# EAGLE board mouse (EAGLE 8.0.0)
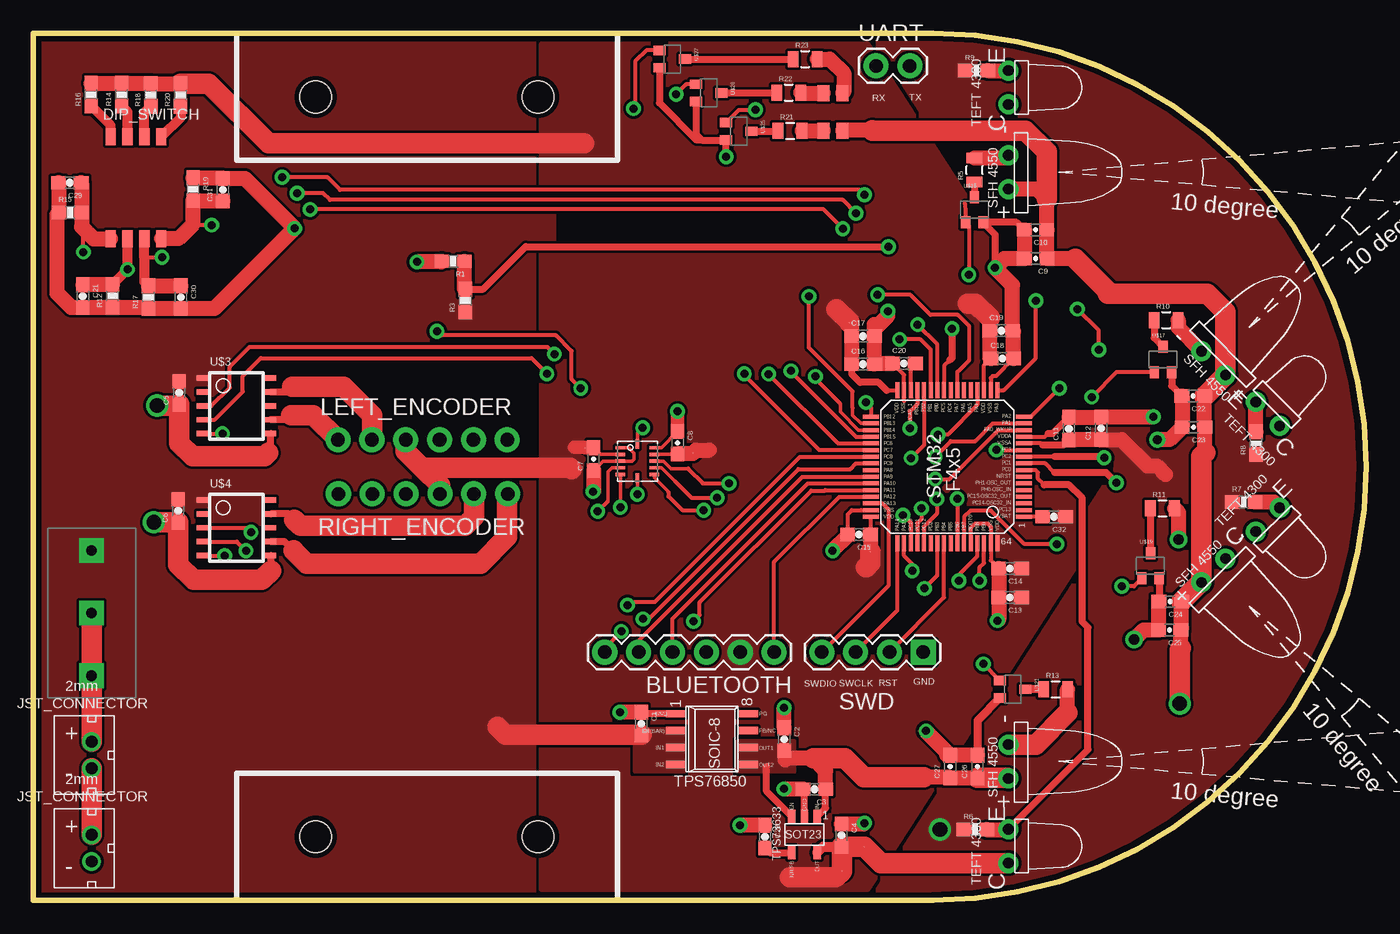
[diagram p0: board, top side]
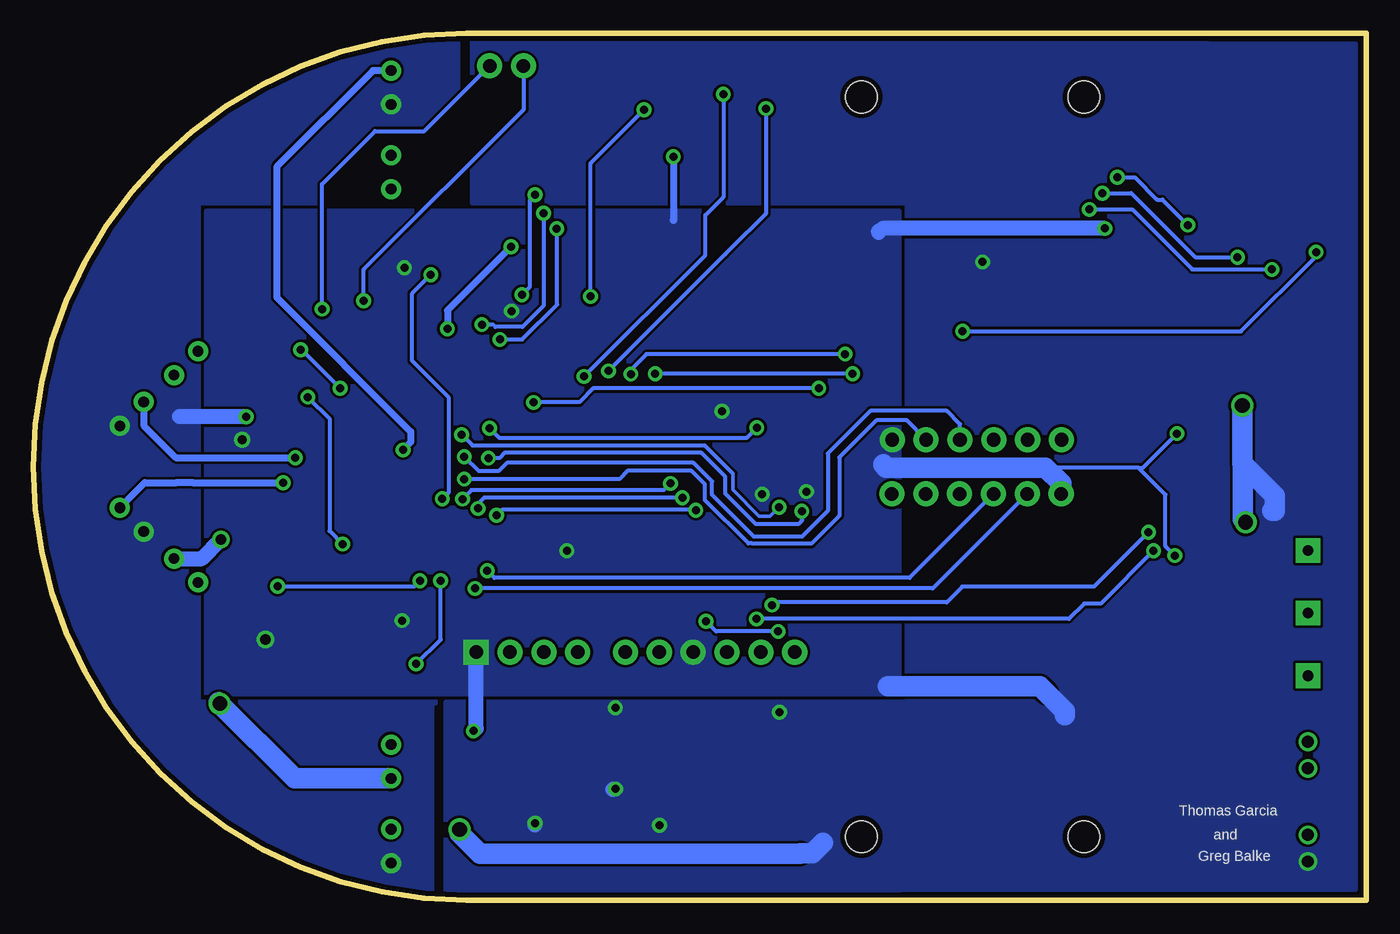
[diagram p1: board, bottom side, seen from below]

Size 100 x 65.02 mm. Coordinates in mm from the lower left corner, seen from the top.
Outline: 0,0 0,65.02 67.49,65.02 arc-180 67.49,0 0,0
Copper layers (1*16): Top 0.0356mm / dielectric 1.5011mm / Bottom 0.0356mm
Design rules "micromouse2016-17DRC": minimum track width 10mil, minimum drill 16mil, track to track 8mil, track to pad 8mil, pad to pad 8mil, via to via 8mil, smd to smd 8mil, copper to edge 15mil, drill to drill 8mil, minimum pad ring 10mil, minimum via ring 10mil, stop-mask expansion 4mil, vias tented up to drill 0mil, thermal gap 10mil
Holes 2.38 mm at 37.87,60.25 21.18,60.25 21.18,4.78 37.87,4.78

## Footprints (pad centres in the part's own frame; a part is rotated, then mirrored left to right if it is on the bottom)
JST_CONNECTOR_FEMALE = drill 0.889: + 0,1; - 0,-1
1X06 = drill 1.016 pad 1.88: 1 0,0; 2 2.54,0; 3 5.08,0; 4 7.62,0; 5 10.16,0; 6 12.7,0
0603-CAP = smd 1.1 x 1: 1 -0.85,0; 2 0.85,0
218_4LPSTR = smd 0.76 x 1.27: IN1 -1.95,3.81; IN2 -0.68,3.81; IN3 0.59,3.81; IN4 1.86,3.81; OUT1 -1.95,-3.81; OUT2 -0.68,-3.81; OUT3 0.59,-3.81; OUT4 1.86,-3.81
1X06_NO_SILK = drill 1.016 pad 1.88: 1 0,0; 2 2.54,0; 3 5.08,0; 4 7.62,0; 5 10.16,0; 6 12.7,0
0603-RES = smd 1.1 x 1: 1 -0.85,0; 2 0.85,0
0805 = smd 0.8 x 1.2: 1 -0.9,0; 2 0.9,0
1X04 = drill 1.016 pad 1.88 square: 1 0,0 | drill 1.016 pad 1.88: 2 2.54,0; 3 5.08,0; 4 7.62,0
SPLITTER = smd 0.102 x 0.102: 1 0,0; 2 0,0
LB1930MC = smd 0.833 x 0.406: 1 -2.58,2.08; 2 -2.58,1.04; 3 -2.58,0; 4 -2.58,-1.04; 5 -2.58,-2.08; 6 2.58,2.08; 7 2.58,1.04; 8 2.58,0; 9 2.58,-1.04; 10 2.58,-2.08
4-PLCC = smd 1.2 x 0.9: BLUE -1.4,0.725; GREEN 1.4,0.725; RED 1.4,-0.725; VCC -1.4,-0.725
BMG160 = smd 0.7 x 0.25: P$1 -1.275,1; P$2 -1.275,0.5; P$3 -1.275,0; P$4 -1.275,-0.5; P$5 -1.275,-1; P$7 1.275,-1; P$8 1.275,-0.5; P$9 1.275,0; P$10 1.275,0.5; P$11 1.275,1 | smd 0.25 x 0.7: P$6 0,-1.275; P$12 0,1.275
EMITTER = drill 0.8 pad 1.5: + 1.27,-0.5; - -1.27,-0.5
RECEIVER = drill 0.8 pad 1.5: C 1.27,-0.5; E -1.27,-0.5
DMG1012UW = smd 0.7 x 0.9: DRAIN 0,1; GATE -0.65,-0.9; SOURCE 0.65,-0.9
TPS76850(SOIC-8) = smd 0.55 x 1.5: EN(BAR) -0.635,-2.7; FB/NC -0.635,2.7; GND -1.905,-2.7; IN1 0.635,-2.7; IN2 1.905,-2.7; OUT1 0.635,2.7; OUT2 1.905,2.7; PG -1.905,2.7
TPS73633(SOT-23) = smd 0.55 x 1: EN 0.95,-1.35; GND 0,-1.35; IN -0.95,-1.35; NR/FB 0.95,1.35; OUT -0.95,1.35
STM32F411RE_LQFP64 = smd 1.2 x 0.3: BOOT0 -5.75,-1.75; PA3 5.75,-3.75; PA4 5.75,-2.25; PA5 5.75,-1.75; PA6 5.75,-1.25; PA7 5.75,-0.75; PA14 -5.75,3.75; PA15 -5.75,3.25; PB0 5.75,0.75; PB1 5.75,1.25; PB2 5.75,1.75; PB3 -5.75,0.75; PB4 -5.75,0.25; PB5 -5.75,-0.25; PB6 -5.75,-0.75; PB7 -5.75,-1.25; PB8 -5.75,-2.25; PB9 -5.75,-2.75; PB10 5.75,2.25; PC4 5.75,-0.25; PC5 5.75,0.25; PC10 -5.75,2.75; PC11 -5.75,2.25; PC12 -5.75,1.75; PD2 -5.75,1.25; VCAP_1 5.75,2.75; VDD_0 5.75,-2.75; VDD_1 5.75,3.75; VDD_3 -5.75,-3.75; VSS_0 5.75,-3.25; VSS_1 5.75,3.25; VSS_3 -5.75,-3.25 | smd 0.3 x 1.2: NRST -0.75,-5.75; PA0_WKUP 2.75,-5.75; PA1 3.25,-5.75; PA2 3.75,-5.75; PA8 -0.25,5.75; PA9 -0.75,5.75; PA10 -1.25,5.75; PA11 -1.75,5.75; PA12 -2.25,5.75; PA13 -2.75,5.75; PB12 3.75,5.75; PB13 3.25,5.75; PB14 2.75,5.75; PB15 2.25,5.75; PC0 -0.25,-5.75; PC1 0.25,-5.75; PC2 0.75,-5.75; PC3 1.25,-5.75; PC6 1.75,5.75; PC7 1.25,5.75; PC8 0.75,5.75; PC9 0.25,5.75; PC13 -3.25,-5.75; PC14 -2.75,-5.75; PC15 -2.25,-5.75; PH0 -1.75,-5.75; PH1 -1.25,-5.75; VBAT -3.75,-5.75; VDD_2 -3.75,5.75; VDDA 2.25,-5.75; VSS_2 -3.25,5.75; VSSA 1.75,-5.75
500SSP1S2M2QEA = drill 0.8 pad 1.854 square: 1 0,4.699; 2 0,0; 3 0,-4.699
1X02 = drill 1.016 pad 1.88: 1 0,0; 2 2.54,0

## Placement (x,y rotation side)
BAT1  JST_CONNECTOR_FEMALE  [JST_CONNECTOR_FEMALE]  4.37,3.91 0 top
BAT2  JST_CONNECTOR_FEMALE  [JST_CONNECTOR_FEMALE]  4.37,10.9 0 top
BLUETOOTH  [1X06]  55.58,18.62 180 top
C1  100nF  [0603-CAP]  45.62,13.26 270 top
C2  10uF  [0603-CAP]  56.34,12.09 270 top
C3  100nF  [0603-CAP]  58.6,8.33 180 top
C4  10uF  [0603-CAP]  60.63,4.88 270 top
C5  1uF  [0603-CAP]  10.95,38.05 90 top
C6  1uF  [0603-CAP]  10.87,29.21 90 top
C7  100nF  [0603-CAP]  42.04,33.1 90 top
C8  100nF  [0603-CAP]  48.34,34.32 270 top
C9  100nF  [0603-CAP]  75.21,48.13 180 top
C10  4.7uF  [0603-CAP]  75.18,50.29 180 top
C11  100nF  [0603-CAP]  77.7,35.38 90 top
C12  1uF  [0603-CAP]  80.11,35.41 90 top
C13  100nF  [0603-CAP]  73.28,22.71 180 top
C14  100nF  [0603-CAP]  73.28,24.89 180 top
C15  100nF  [0603-CAP]  61.95,27.43 180 top
C16  100nF  [0603-CAP]  62.26,40.21 0 top
C17  100nF  [0603-CAP]  62.26,42.32 0 top
C18  100nF  [0603-CAP]  72.69,40.64 0 top
C19  4.7uF  [0603-CAP]  72.62,42.72 0 top
C20  4.7uF  [0603-CAP]  65.33,40.26 0 top
C21  100nF  [0603-CAP]  3.71,45.31 270 top
C22  100nF  [0603-CAP]  87.02,37.82 180 top
C23  4.7uF  [0603-CAP]  87.05,35.48 180 top
C24  100nF  [0603-CAP]  85.29,22.4 180 top
C25  4.7uF  [0603-CAP]  85.27,20.27 180 top
C26  100nF  [0603-CAP]  70.84,10.03 90 top
C27  4.7uF  [0603-CAP]  68.78,10.03 90 top
C28  10nF  [0603-CAP]  54.89,4.78 270 top
C29  100nF  [0603-CAP]  2.74,53.82 180 top
C30  100nF  [0603-CAP]  11.07,45.24 270 top
C31  100nF  [0603-CAP]  14.22,53.29 90 top
C32  100nF  [0603-CAP]  76.58,28.77 180 top
DIP_SWITCH  218_4LPSTR  [218_4LPSTR]  7.75,53.44 0 top
LEFT_ENCODER  [1X06_NO_SILK]  22.86,34.54 0 top
R1  33k  [0603-RES]  31.5,47.93 180 top
R3  51k  [0603-RES]  32.41,44.98 90 top
R5  36  [0805]  70.61,54.76 90 top
R6  1.8k  [0603-RES]  70.66,5.31 0 top
R7  1.8k  [0603-RES]  90.81,29.87 0 top
R8  1.8k  [0603-RES]  91.74,34.29 90 top
R9  1.8k  [0603-RES]  70.76,62.23 0 top
R10  36  [0805]  84.99,43.51 0 top
R11  36  [0805]  84.71,29.39 0 top
R12  10k  [0603-RES]  5.94,45.34 90 top
R13  36  [0805]  76.71,15.82 0 top
R14  360  [0603-RES]  6.63,60.43 90 top
R15  10k  [0603-RES]  2.77,51.59 0 top
R16  360  [0603-RES]  4.34,60.43 90 top
R17  10k  [0603-RES]  8.64,45.24 90 top
R18  360  [0603-RES]  8.81,60.4 90 top
R19  10k  [0603-RES]  11.99,53.34 270 top
R20  360  [0603-RES]  11.05,60.4 90 top
R21  82  [0805]  56.77,57.71 0 top
R22  82  [0805]  56.67,60.58 0 top
R23  150  [0805]  57.91,63.09 0 top
RIGHT_ENCODER  [1X06_NO_SILK]  35.59,30.48 180 top
SWD  [1X04]  66.78,18.62 180 top
U$1  SPLITTER  [SPLITTER]  9.27,32.74 0 bottom
U$2  SPLITTER  [SPLITTER]  23.95,15.52 0 bottom
U$3  LB1930MCSMD  [LB1930MC]  15.24,37.08 0 top
U$4  LB1930MCSMD  [LB1930MC]  15.24,27.94 0 top
U$5  XZMECBDDG45S  [4-PLCC]  59.99,59.13 90 top
U$6  BMG160  [BMG160]  45.31,32.94 0 top
U$7  EMITTER  [EMITTER]  88.9,40.64 315 top
U$8  RECEIVER  [RECEIVER]  73.66,4.06 270 top
U$9  SPLITTER  [SPLITTER]  42.44,3.53 0 bottom
U$10  RECEIVER  [RECEIVER]  92.96,28.19 225 top
U$11  RECEIVER  [RECEIVER]  92.96,36.83 315 top
U$12  RECEIVER  [RECEIVER]  73.66,60.96 270 top
U$13  SPLITTER  [SPLITTER]  60.66,2.18 0 top
U$14  SPLITTER  [SPLITTER]  62.36,4.01 180 top
U$15  DMG1012UW  [DMG1012UW]  70.61,51.74 0 top
U$16  EMITTER  [EMITTER]  88.9,24.38 225 top
U$17  DMG1012UW  [DMG1012UW]  84.76,40.51 0 top
U$18  EMITTER  [EMITTER]  73.66,10.41 270 top
U$19  DMG1012UW  [DMG1012UW]  83.82,25.04 0 top
U$21  DMG1012UW  [DMG1012UW]  73.43,15.82 270 top
U$22  TPS76850(SOIC-8)  [TPS76850(SOIC-8)]  50.9,12.09 270 top
U$23  TPS73633(SOT-23)  [TPS73633(SOT-23)]  57.86,4.93 180 top
U$24  STM32F411RE_LQFP64  [STM32F411RE_LQFP64]  68.58,32.51 90 top
U$25  DMG1012UW  [DMG1012UW]  52.88,57.68 270 top
U$26  DMG1012UW  [DMG1012UW]  50.62,60.55 270 top
U$27  DMG1012UW  [DMG1012UW]  47.88,63.09 270 top
U$28  500SSP1S2M2QEA  [500SSP1S2M2QEA]  4.37,21.54 0 top
U$29  SPLITTER  [SPLITTER]  61.24,43.33 0 top
U$30  SPLITTER  [SPLITTER]  71.75,43.69 0 top
U$31  SPLITTER  [SPLITTER]  41.38,33.93 0 top
U$32  SPLITTER  [SPLITTER]  49.48,33.53 0 top
U$33  SPLITTER  [SPLITTER]  62.81,26.14 0 top
U$34  EMITTER  [EMITTER]  73.66,54.61 270 top
UART  [1X02]  63.22,62.59 0 top

## Library data of the parts
BAT1 BAT2 = JST_CONNECTOR_FEMALE. through hole
BLUETOOTH LEFT_ENCODER RIGHT_ENCODER = SparkFun-Connectors; PROD_ID: CONN-08437
C1-C4 C20 C21 C28-C31 R5 R10-R23 = SparkFun
C5 C6 C11-C19 C32 R1 R3 = SparkFun-Passives
C7-C10 C22-C27 = SparkFun-Capacitors
DIP_SWITCH U$3-U$6 U$15 U$17 U$19 U$21 U$24-U$28 = custom_parts
R6-R9 = SparkFun-Resistors
SWD = SparkFun-Connectors; PROD_ID: CONN-09696
U$1 U$2 U$9 U$13 U$14 U$29-U$33 = natcar
U$7 U$16 U$18 U$34 = sfh4550 _ teft4300
U$8 U$10-U$12 = sfh4550 & teft4300
U$22 = TPS76850(SOIC-8)
U$23 = TPS73633(SOT-23)
UART = SparkFun-Connectors

## Nets
5V: C2.2 C3.1 C9.1 C10.1 C22.1 C23.1 C24.1 C25.1 C26.1 C27.1 U$5.VCC U$7.+ U$16.+ U$18.+ U$22.OUT1 U$22.OUT2 U$23.EN U$23.IN U$34.+
AGND: C11.1 C12.1 R6.1 R7.1 R8.1 R9.1 U$9.1 U$24.VSSA
BAT: C1.2 C5.2 C6.2 R3.1 U$3.1 U$4.1 U$22.EN(BAR) U$22.IN1 U$22.IN2 U$28.1
BAT_DIVIDER: R1.1 R3.2 U$24.PC5
BLUE_GATE: U$24.PB13 U$25.GATE
BRX: BLUETOOTH.4 U$24.PA10
BTX: BLUETOOTH.5 U$24.PA9
BUTTON1: C29.1 DIP_SWITCH.OUT1 R15.2 U$24.PB12
BUTTON2: C21.1 DIP_SWITCH.OUT2 R12.2 U$24.PB1
BUTTON3: C30.1 DIP_SWITCH.OUT3 R17.2 U$24.PB0
BUTTON4: C31.1 DIP_SWITCH.OUT4 R19.2 U$24.PA7
CTS: BLUETOOTH.6 U$24.PA11
DGND: BLUETOOTH.3 C7.1 C8.1 C9.2 C10.2 C13.2 C14.2 C15.2 C16.2 C17.2 C18.2 C19.2 C20.1 C21.2 C22.2 C23.2 C24.2 C25.2 C26.2 C27.2 C29.2 C30.2 C31.2 LEFT_ENCODER.6 R12.1 R15.1 R17.1 R19.1 RIGHT_ENCODER.6 SWD.1 U$2.1 U$3.5 U$4.5 U$6.P$1 U$6.P$3 U$6.P$6 U$6.P$11 U$15.SOURCE U$17.SOURCE U$19.SOURCE U$21.SOURCE U$24.BOOT0 U$24.VSS_0 U$24.VSS_1 U$24.VSS_2 U$24.VSS_3 U$25.SOURCE U$26.SOURCE U$27.SOURCE
FRONT_LEFT_EMITTER: U$17.GATE U$24.PB7
FRONT_LEFT_RECEIVER: R8.2 U$11.E U$24.PC2
FRONT_RIGHT_EMITTER: U$19.GATE U$24.PB9
FRONT_RIGHT_RECEIVER: R7.2 U$10.E U$24.PC1
GND: BAT1.- C1.1 C2.1 C3.2 C4.1 C28.1 R1.2 U$1.2 U$2.2 U$9.2 U$22.GND U$23.GND
GREEN_GATE: U$24.PB14 U$26.GATE
GYRO_INT1: U$6.P$4 U$24.PB2
GYRO_INT2: U$6.P$12 U$24.PB10
LEFT_A: LEFT_ENCODER.4 U$24.PA1
LEFT_B: LEFT_ENCODER.5 U$24.PA0_WKUP
LEFT_BWD: U$3.3 U$24.PC6
LEFT_EMITTER: U$15.GATE U$24.PB6
LEFT_FWD: U$3.4 U$24.PC7
LEFT_RECEIVER: R9.2 U$12.E U$24.PC3
MGND: C5.1 C6.1 U$1.1 U$3.10 U$4.10
MISO: U$6.P$8 U$24.PC11
MOSI: U$6.P$9 U$24.PC12
N$1: BAT1.+ BAT2.-
N$2: RIGHT_ENCODER.2 U$4.7
N$3: RIGHT_ENCODER.1 U$4.9
N$4: LEFT_ENCODER.2 U$3.7
N$5: LEFT_ENCODER.1 U$3.9
N$6: R5.2 U$34.-
N$7: BAT2.+ U$28.2 U$28.3
N$8: C20.2 U$24.VCAP_1
N$9: R5.1 U$15.DRAIN
N$10: R10.2 U$7.-
N$11: R10.1 U$17.DRAIN
N$12: R11.2 U$16.-
N$13: R21.2 U$5.BLUE
N$14: R11.1 U$19.DRAIN
N$15: R13.2 U$18.-
N$16: R13.1 U$21.DRAIN
N$17: C28.2 U$23.NR/FB
N$18: C4.2 U$13.2 U$14.2 U$23.OUT
N$19: C32.2 U$24.VBAT
N$20: DIP_SWITCH.IN2 R14.1
N$21: DIP_SWITCH.IN1 R16.1
N$22: R22.2 U$5.GREEN
N$23: DIP_SWITCH.IN3 R18.1
N$24: R23.2 U$5.RED
N$25: DIP_SWITCH.IN4 R20.1
N$26: R22.1 U$26.DRAIN
N$27: R21.1 U$25.DRAIN
N$28: R23.1 U$27.DRAIN
N$30: C8.2 U$6.P$10 U$32.2
N$32: C7.2 U$6.P$2 U$31.2
RED_GATE: U$24.PB15 U$27.GATE
RIGHT_A: RIGHT_ENCODER.4 U$24.PA15
RIGHT_B: RIGHT_ENCODER.5 U$24.PB3
RIGHT_BWD: U$4.3 U$24.PC8
RIGHT_EMITTER: U$21.GATE U$24.PB8
RIGHT_FWD: U$4.4 U$24.PC9
RIGHT_RECEIVER: R6.2 U$8.E U$24.PC0
RST: SWD.2 U$24.PB4
RTS: BLUETOOTH.1 U$24.PA12
RX: U$24.PA3 UART.1
SCK: U$6.P$7 U$24.PC10
SS: U$6.P$5 U$24.PA4
SWCLK: SWD.3 U$24.PA14
SWDIO: SWD.4 U$24.PA13
TX: U$24.PA2 UART.2
VDD: BLUETOOTH.2 C13.1 C14.1 C32.1 LEFT_ENCODER.3 R14.2 R16.2 R18.2 R20.2 RIGHT_ENCODER.3 U$13.1 U$24.VDD_3 U$29.2 U$30.2 U$31.1 U$32.1 U$33.1
VDD15: C15.1 U$24.VDD_2 U$33.2
VDD_0: C18.1 C19.1 U$24.VDD_0 U$30.1
VDD_1: C16.1 C17.1 U$24.VDD_1 U$29.1
VDDA: C11.2 C12.2 U$8.C U$10.C U$11.C U$12.C U$14.1 U$24.VDDA

## Tracks (layer width: path | path; a pad name or v marks a point on that pad's centre or on a via)
5V  (via drill 1.1)
  Top 0.508: U$23.EN 55.02,8.17 55.02,10.03 | U$23.IN 59.45,6.91 C3.1
  Top 1.143: C26.1 C27.1 68.75,9.22 66.8,9.22 | 86.11,18.9 86.11,20.74 C25.1 86.12,22.38 C24.1 86.21,22.4 | C22.1 87.87,35.48 C23.1 87.9,33.29 87.65,33.29 | 78.18,48.13 C9.1 76.06,50.27 C10.1 76.03,52.62 75.31,53.34 U$34.+ | 62.94,57.76 60.75,57.76 U$5.VCC | C3.1 59.45,9.72 58.52,10.64 56.54,10.64 56.41,10.52
  Top 1.524: v86,14.76 86,18.8 86.11,18.9 | 87.94,33.58 87.65,33.29 U$16.+ | 89.44,44.13 88.09,45.49 80.62,45.49 80.62,45.7 78.18,48.13 | 89.44,44.13 | 89.44,44.13 U$7.+ C22.1 | U$16.+ | C24.1 87.58,23.84 U$16.+ | U$18.+ 73.12,9.18 C26.1 | 76.03,52.62 76.03,56.15 74.45,57.73 62.97,57.73 62.94,57.76 | 58.52,10.64 60.91,10.64 62.33,9.22 66.8,9.22
  Bottom 1.524: 86.11,14.86 v86,14.76 80.39,9.14 U$18.+
  pour Top (no thermals): 52.83,11.96 57.07,11.96 57.07,9.63 52.83,9.63
AGND  (via drill 1.11)
  Top 0.305: 75.74,34.14 75.62,34.26 U$24.VSSA
  Top 0.508: C11.1 77.3,34.14 75.74,34.14
  Top 1.143: C11.1 80.09,34.53 C12.1 81.65,34.56 83.62,32.59 84.28,32.59 84.94,31.93
  Bottom 1.524: U$9.1 42.47,3.5 66.5,3.5 68.02,5.03 v68.02,5.31
  pour Top (rank 3, no thermals): 60.96,64.31 67.31,64.31 arc-180 67.31,0.79 60.96,0.79 81.28,32.51
BAT
  Top 1.524: C1.2 35.42,12.41 34.82,13.01
  pour Top (rank 3, no thermals): 0.64,64.31 0.64,0.76 39.12,0.76 39.12,64.31
  pour Top (no thermals): 45.16,12.88 48.79,12.88 48.79,9.63 45.16,9.63
BAT_DIVIDER  (via drill 0.6)
  Top 0.305: U$24.PC5 68.33,40.09 68.76,40.51
  Top 0.508: v64.16,49.02 36.95,49.02 33.76,45.83 R3.2 | v68.94,42.88 68.94,40.69 68.76,40.51
  Top 1.143: R3.2 32.35,45.9 R1.1
  Bottom 0.508: v64.16,49.02 68.91,44.27 68.94,44.25 v68.94,42.88
BLUE_GATE  (via drill 0.6)
  Top 0.254: U$24.PB13 62.08,35.76 61.47,36.37 61.47,36.93
  Top 0.305: U$25.GATE 52.93,59.28 v54.18,59.28 | 61.47,36.93 61.47,38.18 58.19,41.45 v58.19,45.29
  Bottom 0.305: v58.19,45.29 58.19,55.27 v54.18,59.28
BRX
  Top 0.305: 47.95,19.07 BLUETOOTH.4 47.95,21.11 58.11,31.26 U$24.PA10
BTX
  Top 0.305: BLUETOOTH.5 45.41,19.48 57.7,31.76 U$24.PA9
BUTTON1  (via drill 0.6)
  Top 0.305: v41.07,38.41 40.39,39.09 40.39,41.2 39.22,42.37 30.58,42.37 v30.28,42.67 | v3.76,48.62 3.76,49.81 4.04,50.09 | v62.46,37.34 62.83,36.97 U$24.PB12
  Top 1.143: C29.1 3.62,53.8 R15.2 3.62,50.51 4.04,50.09 4.52,49.61 5.77,49.61 DIP_SWITCH.OUT1
  Bottom 0.305: v30.28,42.67 9.4,42.67 3.76,48.31 v3.76,48.62 | v62.46,37.34 62.43,37.36 59.03,37.36 57.99,38.41 v41.07,38.41
BUTTON2  (via drill 0.6)
  Top 0.305: U$24.PB1 67.33,41.31 66.57,42.06 v65,42.06 | v60.73,50.37 59.28,51.82 v20.78,51.82
  Top 0.762: R12.2 v7.07,47.31 DIP_SWITCH.OUT2
  Top 1.143: R12.2 5.92,46.16 C21.1
  Bottom 0.305: v65,42.06 63.32,42.06 60.71,44.68 60.71,50.34 v60.73,50.37 | v20.78,51.82 17.55,51.82 13.05,47.31 v7.07,47.31
BUTTON3  (via drill 0.6)
  Top 0.305: U$24.PB0 67.83,41.7 v66.34,43.18 | v9.65,48.23 9.6,48.18 8.34,48.18 | v61.72,51.54 60.73,52.53 22.25,52.53 21.74,53.03 v19.79,53.03
  Top 0.762: R17.2 8.34,46.39 8.34,48.18 DIP_SWITCH.OUT3
  Top 1.143: R17.2 C30.1
  Bottom 0.305: v61.72,51.54 61.72,44.58 63.3,43 65.33,43 65.51,43.18 v66.34,43.18 | v19.79,53.03 17.63,53.03 12.83,48.23 v9.65,48.23
BUTTON4  (via drill 0.6)
  Top 0.305: U$24.PA7 69.33,39.64 | 69.33,39.64 69.37,39.67 | 69.33,39.64 69.36,39.64 70.23,40.51 70.23,43.05 69.37,43.92 67.31,43.92 65.81,45.41 v63.35,45.41 | v13.39,50.65 12.06,50.65 11.99,50.72 | v62.36,52.91 61.98,53.29 23.01,53.29 22.07,54.23 v18.67,54.23
  Top 1.143: C31.1 12.04,52.44 R19.2 11.99,50.72 10.9,49.63 DIP_SWITCH.OUT4
  Bottom 0.305: v62.36,52.91 62.74,52.53 62.74,46.02 v63.35,45.41 | v18.67,54.23 17.37,54.23 15.7,52.55 15.29,52.55 v13.39,50.65
CTS  (via drill 0.6)
  Top 0.305: BLUETOOTH.6 42.88,18.92 v44.12,20.17 | U$24.PA11 59.41,30.76 59.38,30.73 58.37,30.73 49.99,22.35 49.99,21.39 v49.53,20.93
  Bottom 0.305: v44.12,20.17 48.77,20.17 v49.53,20.93
DGND  (via drill 0.6, 0.7, 0.8)
  Top 0.254: C7.1 42.73,32.94 U$6.P$3 44.91,32.94 45.06,33.1 45.06,33.53 44.64,33.94 U$6.P$1 | U$6.P$11 47.12,33.94 C8.1 | U$6.P$6 v45.31,30.45
  Top 0.305: 65.33,37.44 U$24.VSS_1 65.33,39.41 C20.1 | C14.2 71.83,25.49 U$24.VSS_3 71.83,28.02 71.58,28.27 70.66,28.27 70.33,27.94 U$24.BOOT0 | U$24.VSS_0 71.83,39.17 71.98,39.32 72.22,39.32 C18.2 73.47,40.72 | 72.42,22.69 C13.2 72.34,22.62 | U$24.VSS_2 62.1,29.26 61.42,29.26 61.1,28.94 C15.2 61.11,27.8 61.11,27.36 | U$3.5 v14.2,35 | U$4.5 v14.35,25.86
  Top 0.508: C24.2 84.47,22.43 U$19.SOURCE | U$17.SOURCE 85.41,38.58 C22.2 | U$27.SOURCE 46.98,59.8 49.76,57.02 50.16,57.02 | 50.16,57.02 U$25.SOURCE v51.98,55.76 51.99,55.75 | U$26.SOURCE 49.72,57.47 50.16,57.02 | C10.2 73.79,50.84 U$15.SOURCE 72.16,49.94 v72.16,47.45
  Top 0.584: U$21.SOURCE 70.84,13.48 C26.2
  Top 1.016: C8.1 v48.34,36.68
  Top 1.143: C26.2 C27.2 | C27.2 68.54,10.88 | C24.2 84.42,22.38 C25.2 83.29,20.27 v82.58,19.56 | C10.2 74.36,50.27 C9.2 72.85,48.13 v72.16,47.45 73.47,46.14 C19.2 73.55,42.65 C18.2 | C22.2 86.2,37.82 C23.2 85.26,34.54 v84.33,34.54 | C27.2 66.98,12.69 v66.98,12.7 | C14.2 C13.2 72.43,21.07 v72.34,20.98 | C15.2 61.1,27.34 v59.97,26.21 | C29.2 1.89,51.61 R15.1 1.78,51.45 1.78,45.52 2.83,44.46 C21.2 5.92,44.46 R12.1 8.53,44.49 R17.1 C30.2 13.6,44.39 v19.61,50.39 15.86,54.14 C31.2 14.17,54.19 R19.1 | C7.1 42.04,30.71 v41.99,30.66 | C20.1 63.16,40.26 C16.2 C17.2 | C17.2 63.1,42.84 64.11,43.84 v64.11,44.2 | C17.2 63.1,43.19
  Bottom 0.305: 17.09,32.46 16.74,32.46 v14.2,35 | 17.09,32.46 24.05,32.46 | v14.35,25.86 15.06,26.57 15.06,30.43 17.09,32.46
  Bottom 0.508: v51.98,55.76 51.98,51.04 51.94,51 51.99,51
  Bottom 1.143: v66.98,12.7 66.78,12.9 SWD.1 | v19.61,50.39 36.27,50.39 36.58,50.09 36.58,50.22
  Bottom 1.524: U$2.1 24.49,16.05 35.89,16.05 | RIGHT_ENCODER.6 22.89,31.29 24.05,32.46 36.02,32.46 36.22,32.66 36.22,32.69
  pour Bottom (no thermals): 35.05,51.69 35.05,15.49 87,15.49 87,51.69
FRONT_LEFT_EMITTER  (via drill 0.6)
  Top 0.305: v76.78,26.72 74.37,26.72 71.86,29.23 70.31,29.23 69.83,28.76 U$24.PB7 | U$17.GATE 81.27,39.61 v79.4,37.74
  Bottom 0.305: v79.4,37.74 77.78,36.12 77.78,27.71 v76.78,26.72
FRONT_LEFT_RECEIVER  (via drill 0.6)
  Top 0.305: 76.61,33.27 76.59,33.26 U$24.PC2
  Top 0.508: 76.61,33.27 80.26,33.27 v80.34,33.2
  Top 1.143: R8.2 91.71,35.14 U$11.E
  Bottom 0.508: v80.34,33.2 89.31,33.2 91.71,35.6 U$11.E
FRONT_RIGHT_EMITTER  (via drill 0.6)
  Top 0.305: U$19.GATE 82.57,23.55 v81.66,23.55 | v70.99,23.98 70.99,24.97 71.32,25.3 U$24.PB9
  Bottom 0.305: v81.66,23.55 71.42,23.55 v70.99,23.98
FRONT_RIGHT_RECEIVER  (via drill 0.6)
  Top 0.305: 76.61,32.08 75.92,32.76 U$24.PC1
  Top 0.508: v81.25,31.32 80.49,32.08 76.61,32.08
  Top 1.143: R7.2 93.08,29.87 U$10.E
  Bottom 0.508: v81.25,31.32 88.04,31.32 89.26,31.32 91.64,31.32 U$10.E
GND  (via drill 0.6)
  Top 0.508: U$22.GND 45.62,13.99 C1.1 | U$23.GND 57.86,8.22 C3.2
  Top 1.143: C3.2 56.52,8.33 v56.31,8.36 | C28.1 53.02,5.62 v53.01,5.64 | C4.1 62.29,5.73 v62.36,5.79 | C2.1 v56.34,14.45 | C1.1 v44.03,14.11 v44.02,14.1 | R1.2 30.59,47.88 v28.78,47.88
  Bottom 1.143: v56.31,8.36 56.49,8.33 56.52,8.31 | v62.36,5.79 62.36,5.66
  Bottom 1.524: U$2.2 22.61,14.17 22.61,13.87 | U$1.2 6.86,30.33 6.86,29.21 6.91,29.21 6.93,29.23 7.04,29.23 | U$9.2 41.55,3.53 40.77,4.32
  pour Bottom (no thermals): 0.81,64.21 0.81,0.84 69.04,0.76 69.04,14.86 34.42,14.86 34.42,52.32 67.06,52.32 67.06,64.44
GREEN_GATE  (via drill 0.6)
  Top 0.254: U$24.PB14 61.92,35.26 60.55,36.63 60.55,37.24
  Top 0.305: U$26.GATE 48.99,61.2 v48.23,60.45 | 60.55,37.24 58.67,39.12 v58.67,39.29
  Bottom 0.305: v48.23,60.45 48.23,52.73 49.58,51.38 49.58,48.39 v58.67,39.29
GYRO_INT1  (via drill 0.6)
  Top 0.254: U$6.P$4 43.42,32.44 43.1,32.13 43.1,29.95
  Top 0.305: 43.1,29.95 v42.34,29.18 | U$24.PB2 66.83,34.14 v65.86,33.17
  Bottom 0.305: v65.86,33.17 65.02,33.17 64.64,33.55 49.89,33.55 48.08,31.75 48.08,30.5 45.8,28.22 42.6,28.22 42.34,28.47 v42.34,29.18
GYRO_INT2  (via drill 0.6)
  Top 0.254: U$6.P$12 45.31,35.03 v45.72,35.43
  Top 0.305: U$24.PB10 66.33,37.22 65.76,36.65 v65.76,35.41
  Bottom 0.305: v45.72,35.43 46.46,34.7 65.05,34.7 v65.76,35.41
LEFT_A  (via drill 0.6)
  Top 0.305: v67.67,33.27 68.83,34.44 70.66,34.44 71.98,35.76 U$24.PA1
  Bottom 0.305: LEFT_ENCODER.4 30.48,35.71 31.47,36.7 37.21,36.7 40.39,33.53 40.39,29.21 42.32,27.28 45.95,27.28 49.07,30.4 49.07,31.42 50.47,32.82 64.47,32.82 65.1,32.18 66.57,32.18 v67.67,33.27
LEFT_B  (via drill 0.6)
  Top 0.305: v67.67,31.6 68.73,31.6 72.4,35.26 U$24.PA0_WKUP
  Bottom 0.305: LEFT_ENCODER.5 34.47,35.99 36.75,35.99 39.52,33.22 39.52,28.85 41.63,26.75 46.05,26.75 46.08,26.77 46.35,26.77 49.61,30.02 49.61,31.19 50.62,32.21 55.42,32.21 56.03,31.6 v67.67,31.6
LEFT_BWD  (via drill 0.6)
  Top 0.305: U$3.3 13.36,37.08 14.73,38.46 14.73,40.01 16.23,41.5 38.56,41.5 v39.09,40.97 | v55.17,39.47 60.38,34.26 U$24.PC6
  Bottom 0.305: v39.09,40.97 54,40.97 55.17,39.8 v55.17,39.47
LEFT_EMITTER  (via drill 0.6)
  Top 0.305: 69.88,52.28 U$15.GATE 70.18,50.62 v70.18,46.91 | U$24.PB6 69.33,28.33 69.32,28.35 v69.32,30.12
  Bottom 0.305: v70.18,46.91 71.58,45.52 71.58,40.46 68.86,37.74 68.86,30.58 v69.32,30.12
LEFT_FWD  (via drill 0.6)
  Top 0.305: U$3.4 13.62,36.04 15.72,38.15 15.72,39.32 17.07,40.66 37.36,40.66 v38.53,39.5 | U$24.PC7 58.97,33.76 53.34,39.4 v53.34,39.5
  Bottom 0.305: v38.53,39.5 v53.34,39.5
LEFT_RECEIVER  (via drill 0.6)
  Top 0.305: v72.26,33.78 72.28,33.76 U$24.PC3
  Top 1.143: R9.2 U$12.E
  Bottom 0.508: U$12.E 74.52,62.23 81.74,55.02 81.74,45.21 71.68,35.15 71.68,34.37 v72.26,33.78
MGND  (via drill 1.11)
  Top 0.508: 17.6,33.55 17.82,33.77 U$3.10 | 17.83,24.71 U$4.10
  Top 1.524: 17.6,33.55 17.35,33.3 11.94,33.3 10.95,34.29 C5.1 10.86,37.11 v9.3,37.11 | 17.83,24.71 17.14,24.03 12.01,24.03 10.87,25.17 C6.1 10.86,28.35 v9.04,28.35
  Bottom 1.524: v9.04,28.35 9.27,28.57 U$1.1 9.3,32.77 v9.3,37.11
MISO  (via drill 0.6)
  Top 0.254: U$6.P$8 47.13,32.44 48.16,31.42
  Top 0.305: v51.31,30.2 49.38,30.2 48.16,31.42 | v66.62,29.39 66.62,28.57 66.33,28.28 U$24.PC11
  Bottom 0.305: v51.31,30.2 66.17,30.2 66.62,29.74 v66.62,29.39
MOSI  (via drill 0.6)
  Top 0.254: U$6.P$9 47.3,32.94 47.85,32.38 49.12,32.38
  Top 0.305: U$24.PC12 66.83,28.02 67.79,28.98 v67.79,30.1 | v52.2,31.27 50.24,31.27 49.12,32.38
  Bottom 0.305: 67.79,30.4 v67.79,30.1 67.13,30.76 52.7,30.76 v52.2,31.27
N$1
  Top 1.524: BAT1.+ BAT2.-
N$2
  Top 0.508: 20.04,28.09 19.15,28.98 U$4.7
  Top 1.524: RIGHT_ENCODER.2 33.07,30.45 33.07,28.78 32.38,28.09 20.04,28.09 19.58,28.55
N$3
  Top 0.305: U$4.9 18.24,26.9
  Top 0.508: 19.53,26.21 18.84,26.9 U$4.9
  Top 1.524: RIGHT_ENCODER.1 35.56,30.45 35.56,27.25 33.55,25.25 20.5,25.25 19.53,26.21 19.53,26.24
N$4
  Top 0.508: 19.41,38.53 19,38.12 U$3.7
  Top 1.524: LEFT_ENCODER.2 25.43,34.57 25.43,36.37 23.27,38.53 19.41,38.53
N$5
  Top 0.508: 19.36,36.4 19,36.04 U$3.9
  Top 1.524: 19.36,36.4 21.01,36.4 LEFT_ENCODER.1
N$6
  Top 1.143: U$34.- 72.94,55.66 R5.2
N$7
  Top 1.524: U$28.2 U$28.3 BAT2.+
N$8
  Top 0.305: U$24.VCAP_1 65.83,39.91 C20.2
N$9
  Top 0.508: R5.1 U$15.DRAIN
N$10
  Top 1.143: U$7.- 85.89,42.94 R10.2
N$11
  Top 0.508: R10.1 84.09,42.18 U$17.DRAIN
N$12  (via drill 0.8)
  Top 1.143: v85.93,27.05 85.93,29.07 R11.2
  Bottom 1.143: v85.93,27.05 87.34,25.64 U$16.-
N$13
  Top 1.143: R21.2 57.69,57.73 U$5.BLUE
N$14
  Top 0.508: R11.1 83.81,26.05 U$19.DRAIN
N$15
  Top 1.143: 77.6,14.07 77.6,15.81 R13.2
  Top 1.524: 77.6,14.07 75.21,11.68 U$18.-
N$16
  Top 0.584: R13.1 U$21.DRAIN
N$17
  Top 0.508: C28.2 55.24,3.58 U$23.NR/FB
N$18
  Top 0.762: U$23.OUT 59.26,4.03 C4.2
  Top 1.524: U$14.2 62.34,4.03 C4.2 60.66,4 U$13.2
N$19
  Top 0.305: C32.2 U$24.VBAT
N$20
  Top 0.305: R14.1 7.07,59.04
  Top 0.762: DIP_SWITCH.IN2 7.07,59.14 R14.1
N$21
  Top 0.762: DIP_SWITCH.IN1 5.8,58.12 R16.1
N$22
  Top 1.143: R22.2 57.62,60.53 U$5.GREEN
N$23
  Top 0.762: DIP_SWITCH.IN3 8.34,59.07 R18.1
N$24
  Top 1.143: R23.2 59.77,63.09 60.81,62.05 60.81,60.62 U$5.RED
N$25
  Top 0.762: R20.1 11.05,58.69 DIP_SWITCH.IN4
N$26
  Top 0.508: U$26.DRAIN 55.74,60.55 R22.1
N$27
  Top 0.508: U$25.DRAIN 55.84,57.68 R21.1
N$28
  Top 0.508: U$27.DRAIN R23.1
N$30
  Top 0.254: C8.2 48.31,33.44 U$6.P$10
  Top 1.143: C8.2 48.4,33.53 U$32.2
N$32
  Top 0.254: C7.2 42.54,33.44 U$6.P$2
  Top 0.762: C7.2 42.02,33.93 U$31.2
RED_GATE  (via drill 0.6)
  Top 0.305: U$27.GATE 45.99,63.74 45.16,62.92 45.16,59.51 v45.03,59.38 | v56.84,39.7 56.84,39.65 61.73,34.76 U$24.PB15
  Bottom 0.305: v56.84,39.7 48.09,48.45 47.75,48.79 45.03,51.51 v45.03,59.38
RIGHT_A  (via drill 0.6)
  Top 0.305: v65.94,24.71 65.94,25.22 65.33,25.83 U$24.PA15
  Bottom 0.305: RIGHT_ENCODER.4 34.27,24.18 65.41,24.18 v65.94,24.71
RIGHT_B  (via drill 0.6)
  Top 0.305: v66.85,23.39 67.83,24.37 U$24.PB3
  Bottom 0.305: RIGHT_ENCODER.5 32.51,23.39 v66.85,23.39
RIGHT_BWD  (via drill 0.6)
  Top 0.305: U$4.3 16,27.94 v16.33,27.61 | v44.58,22.15 44.81,22.38 46.63,22.38 57.52,33.26 U$24.PC8
  Bottom 0.305: v16.33,27.61 20.42,23.52 30.3,23.52 31.47,22.35 44.37,22.35 v44.58,22.15
RIGHT_EMITTER  (via drill 0.6)
  Top 0.305: 72.53,16.5 U$21.GATE v71.28,17.73 v71.27,17.73 | v69.44,23.98 69.44,24.41 70.83,25.8 U$24.PB8
  Bottom 0.305: v71.27,17.73 69.44,19.56 v69.44,23.98
RIGHT_FWD  (via drill 0.6)
  Top 0.305: U$4.4 15.26,26.9 v15.95,26.21 | v45.74,21.11 46.18,21.11 57.4,32.33 61.29,32.33 61.72,32.76 U$24.PC9
  Bottom 0.305: v15.95,26.21 19.91,22.25 21.16,22.25 22.3,21.11 v45.74,21.11
RIGHT_RECEIVER
  Top 0.305: 75.84,31.17 75.39,31.62 75.39,32.08 75.2,32.26 U$24.PC0
  Top 0.508: U$8.E 79.12,11.29 79.12,20.47 78.69,20.9 78.69,30.18 77.7,31.17 75.84,31.17
  Top 1.143: R6.2 73.14,5.31 U$8.E
RST
  Top 0.305: SWD.2 68.33,22.71 U$24.PB4
RTS
  Top 0.305: BLUETOOTH.1 55.58,25.38 60.46,30.26 U$24.PA12
RX  (via drill 0.6)
  Top 0.305: U$24.PA3 72.81,38.26 75.21,40.66 v75.21,44.96
  Bottom 0.305: UART.1 63.2,62.56 63.2,59.33 75.21,47.32 v75.21,44.96
SCK  (via drill 0.6)
  Top 0.254: U$6.P$7 46.59,31.69 47.65,30.63
  Top 0.305: 47.65,30.63 47.65,30.3 48.69,29.26 v50.29,29.26 | v65.25,28.88 65.83,28.3 U$24.PC10
  Bottom 0.305: v65.25,28.88 64.85,29.29 50.32,29.29 v50.29,29.26
SS  (via drill 0.6)
  Top 0.254: U$6.P$5 v44.04,29.49
  Top 0.305: U$24.PA4 70.83,37.15 68.61,34.92 v67.87,34.92
  Bottom 0.254: v44.04,29.49 44.73,28.8 45.54,28.8 47.52,30.79 47.52,32
  Bottom 0.305: 47.52,32 49.63,34.11 67.06,34.11 v67.87,34.92
SWCLK
  Top 0.305: SWD.3 64.83,21.75 U$24.PA14
SWDIO
  Top 0.305: SWD.4 64.19,23.65 64.19,29.29 63.71,29.76 U$24.PA13
TX  (via drill 0.6)
  Top 0.305: U$24.PA2 74.84,36.26 v76.99,38.41 | v79.93,41.3 79.93,42.75 v78.33,44.35
  Bottom 0.305: v76.99,38.41 79.88,41.3 v79.93,41.3 | v78.33,44.35 78.33,49.86 | 78.33,49.86 78.33,50.01 | 78.33,49.86 78.33,53.72 74.37,57.68 70.66,57.68 UART.2
VDD
  Top 1.016: U$31.1 41.33,33.98 40.62,33.98
  Top 1.143: R16.2 R14.2 8.79,61.28 R18.2 R20.2 | U$32.1 49.71,33.76 50.72,33.76
  Top 1.524: 29.17,32.45 40.27,32.45 40.39,32.33 | RIGHT_ENCODER.3 30.5,31.11 29.17,32.45 | 29.17,32.45 27.94,33.68 LEFT_ENCODER.3 | U$13.1 60.2,1.73 56.77,1.73 | R20.2 13.17,61.25 17.65,56.77 41.33,56.77 | U$33.1 62.81,25.32 62.48,24.99 62.51,24.99 62.53,25.02 | U$30.2 70.69,44.76 70.13,44.76 | U$29.2 61.24,43.38 60.27,44.35
  pour Top (rank 2, no thermals): 62.61,64.26 83.06,32.51 62.61,0.76 38.1,0.76 38.1,64.26
VDD15
  Top 0.305: 62.81,27.8 C15.1 62.8,28.73 U$24.VDD_2
  Top 1.143: C15.1 62.81,27.43 U$33.2
VDD_0
  Top 0.305: U$24.VDD_0 71.33,40.12 C18.1 | 71.84,42.65 C19.1
  Top 1.143: C18.1 71.77,40.72 C19.1 71.75,42.74 U$30.1
VDD_1
  Top 0.305: 64.03,38.23 64.8,38.23 U$24.VDD_1
  Top 0.508: C16.1 61.41,39.46 62.03,38.84 63.42,38.84 64.03,38.23
  Top 1.143: C16.1 C17.1 61.41,43.17 U$29.1
VDDA  (via drill 0.6)
  Top 0.305: 76.15,35.03 75.89,34.76 U$24.VDDA
  Top 0.508: 77.61,36.14 C11.2 | 84.02,36.26 v84.02,36.27 | 80.12,36.27 C12.2 | 77.72,36.26 C11.2 | 76.15,35.03 76.49,35.03 C11.2
  Top 1.143: C11.2 80.09,36.23 C12.2 84.02,36.26
  Top 1.524: U$14.1 63.58,2.79 U$8.C
  Bottom 0.508: 89.03,36.27 89.03,36.4
  Bottom 1.143: v84.02,36.27 89.03,36.27
  pour Bottom (no thermals): 70.13,0.79 arc174 68.17,64.44 68.17,52.32 87.63,52.32 87.63,14.86 69.77,14.86 70.13,14.71

## Text on the board
tPlace: RX | TX | SWDIO | SWCLK | RST | GND
bPlace: Thomas Garcia | and | Greg Balke